# Altium PCB IMX_PCB.PcbDoc (part 1 of 2)
Units mm, origin at the board's own origin, x right, y up, seen from the top; angles counter-clockwise.
Board outline 66 x 57 mm, 4 copper layers (L1 (Sensor), L2 (GND), L3 (PWR), L4 (Comp)), stack 1.586 mm thick; 125 components, 55 nets, 466 pads, 337 vias.
Unrouted connection lines stored in the file: 246.
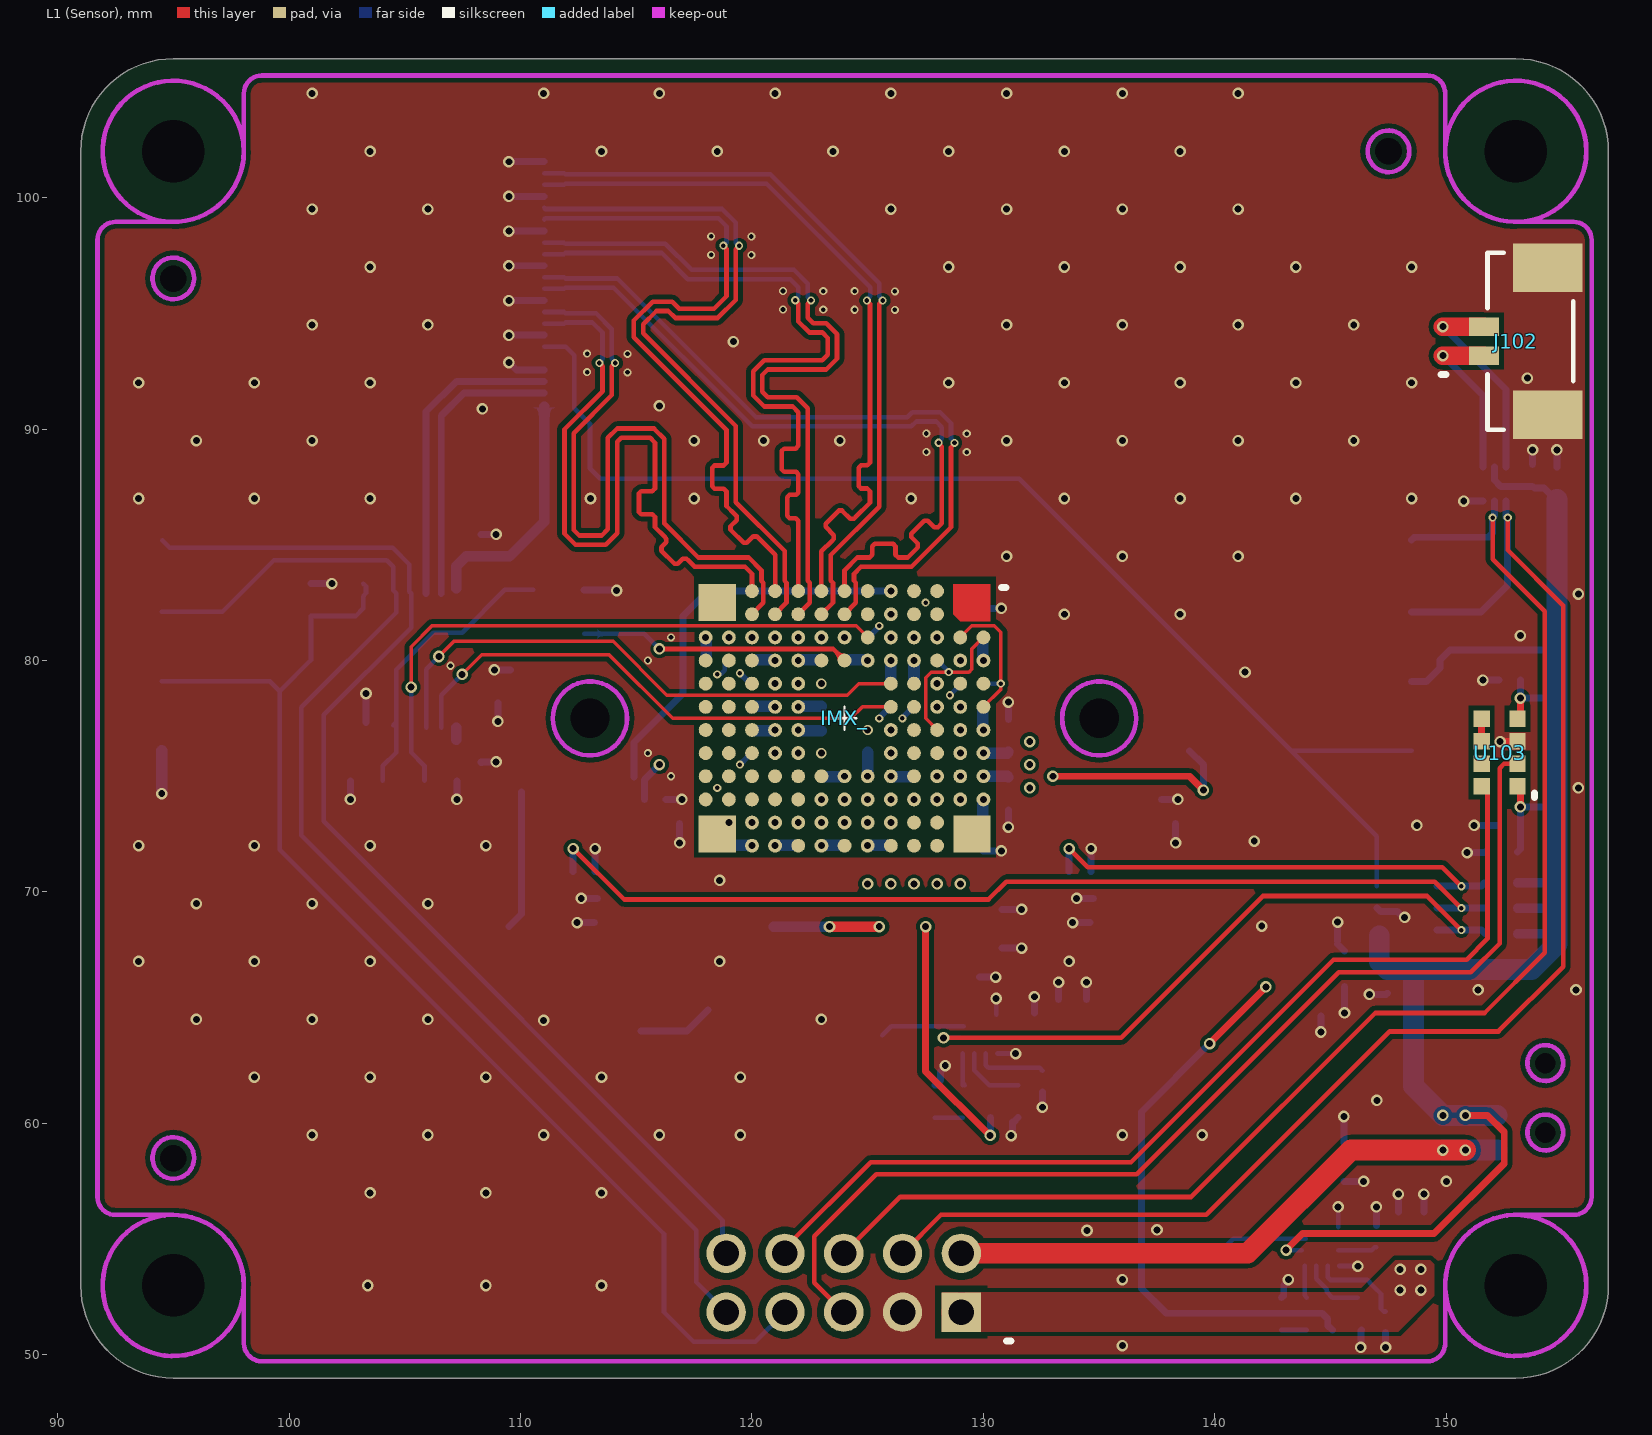
[diagram p0: L1 (Sensor) view]
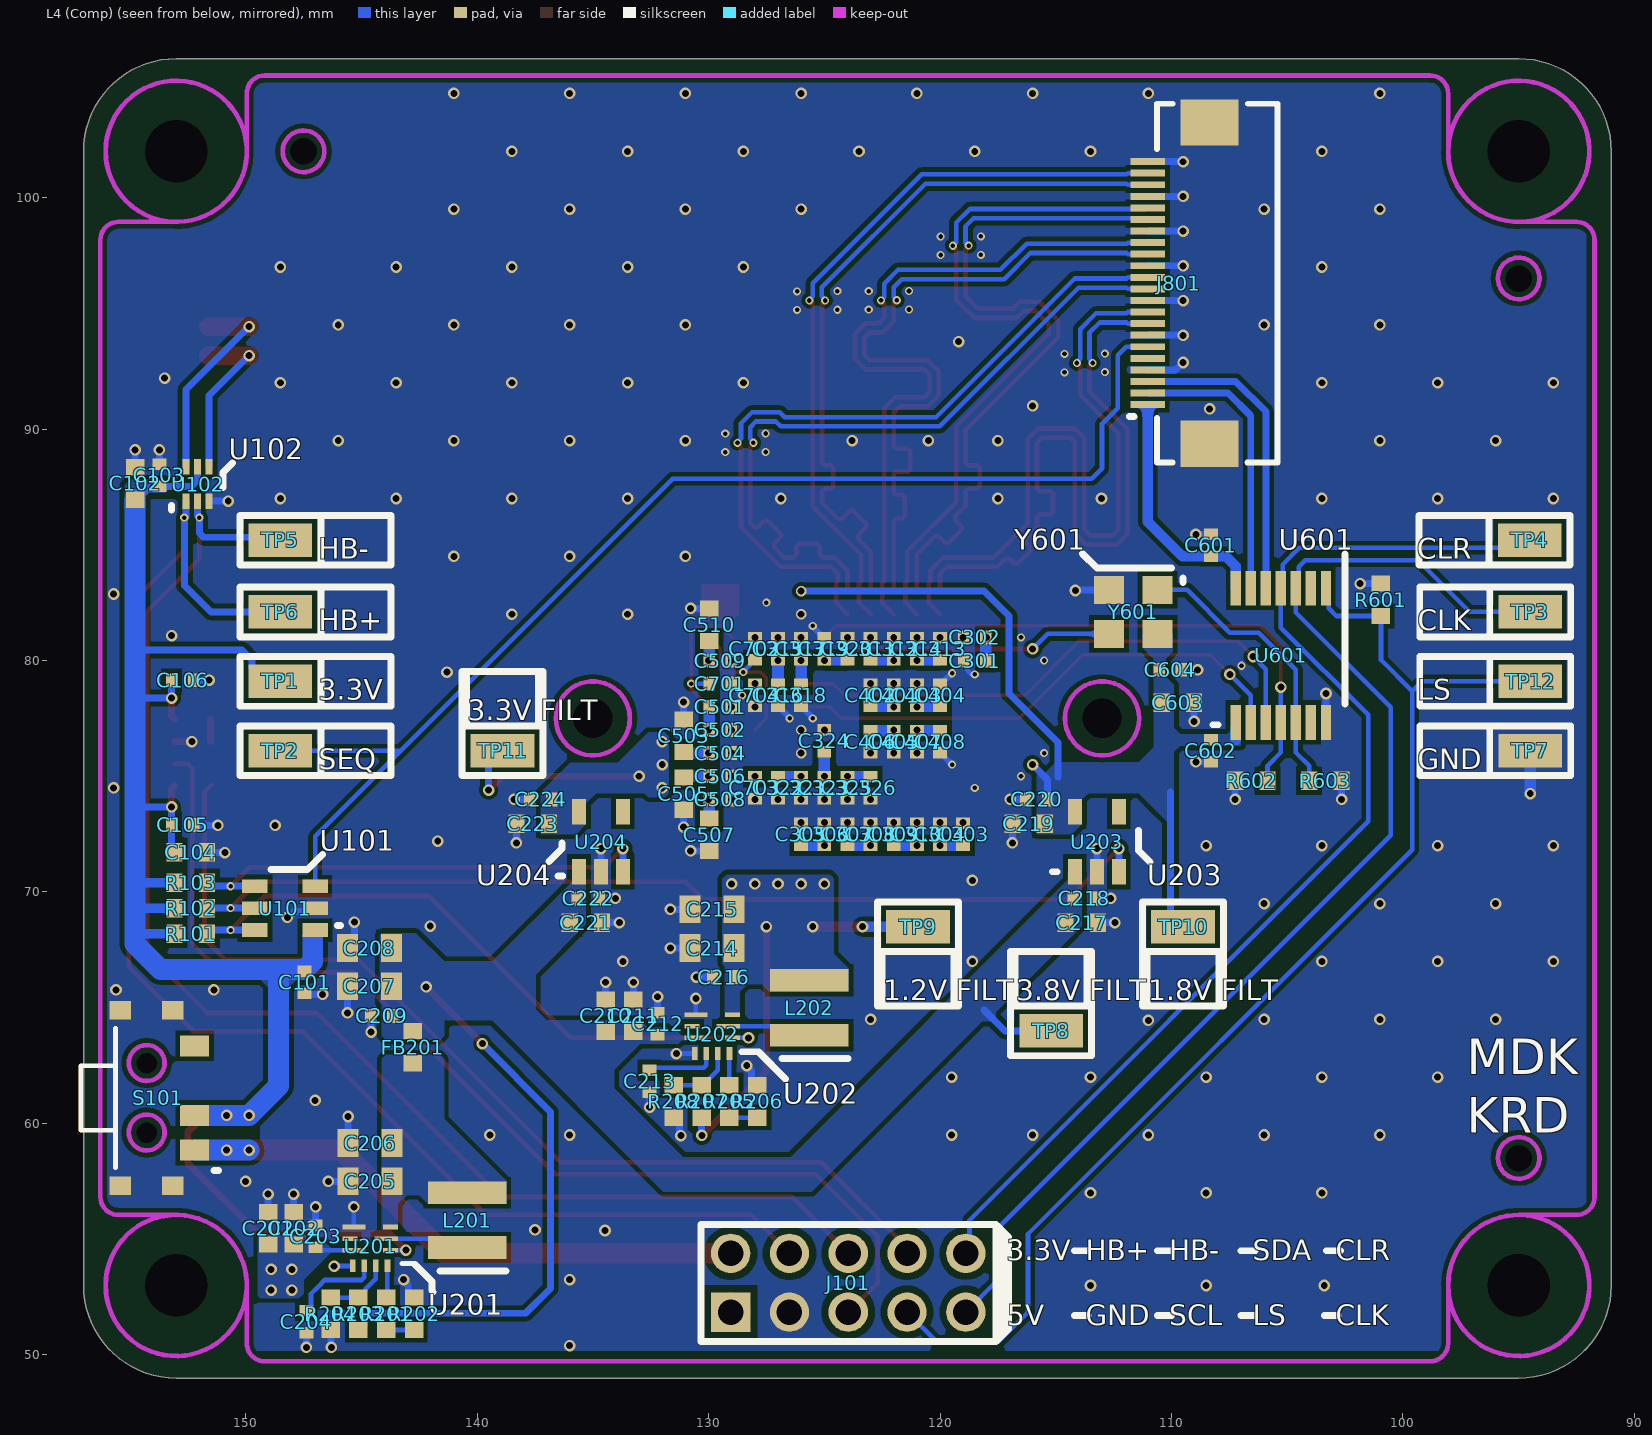
[diagram p1: L4 (Comp) view, seen from below]
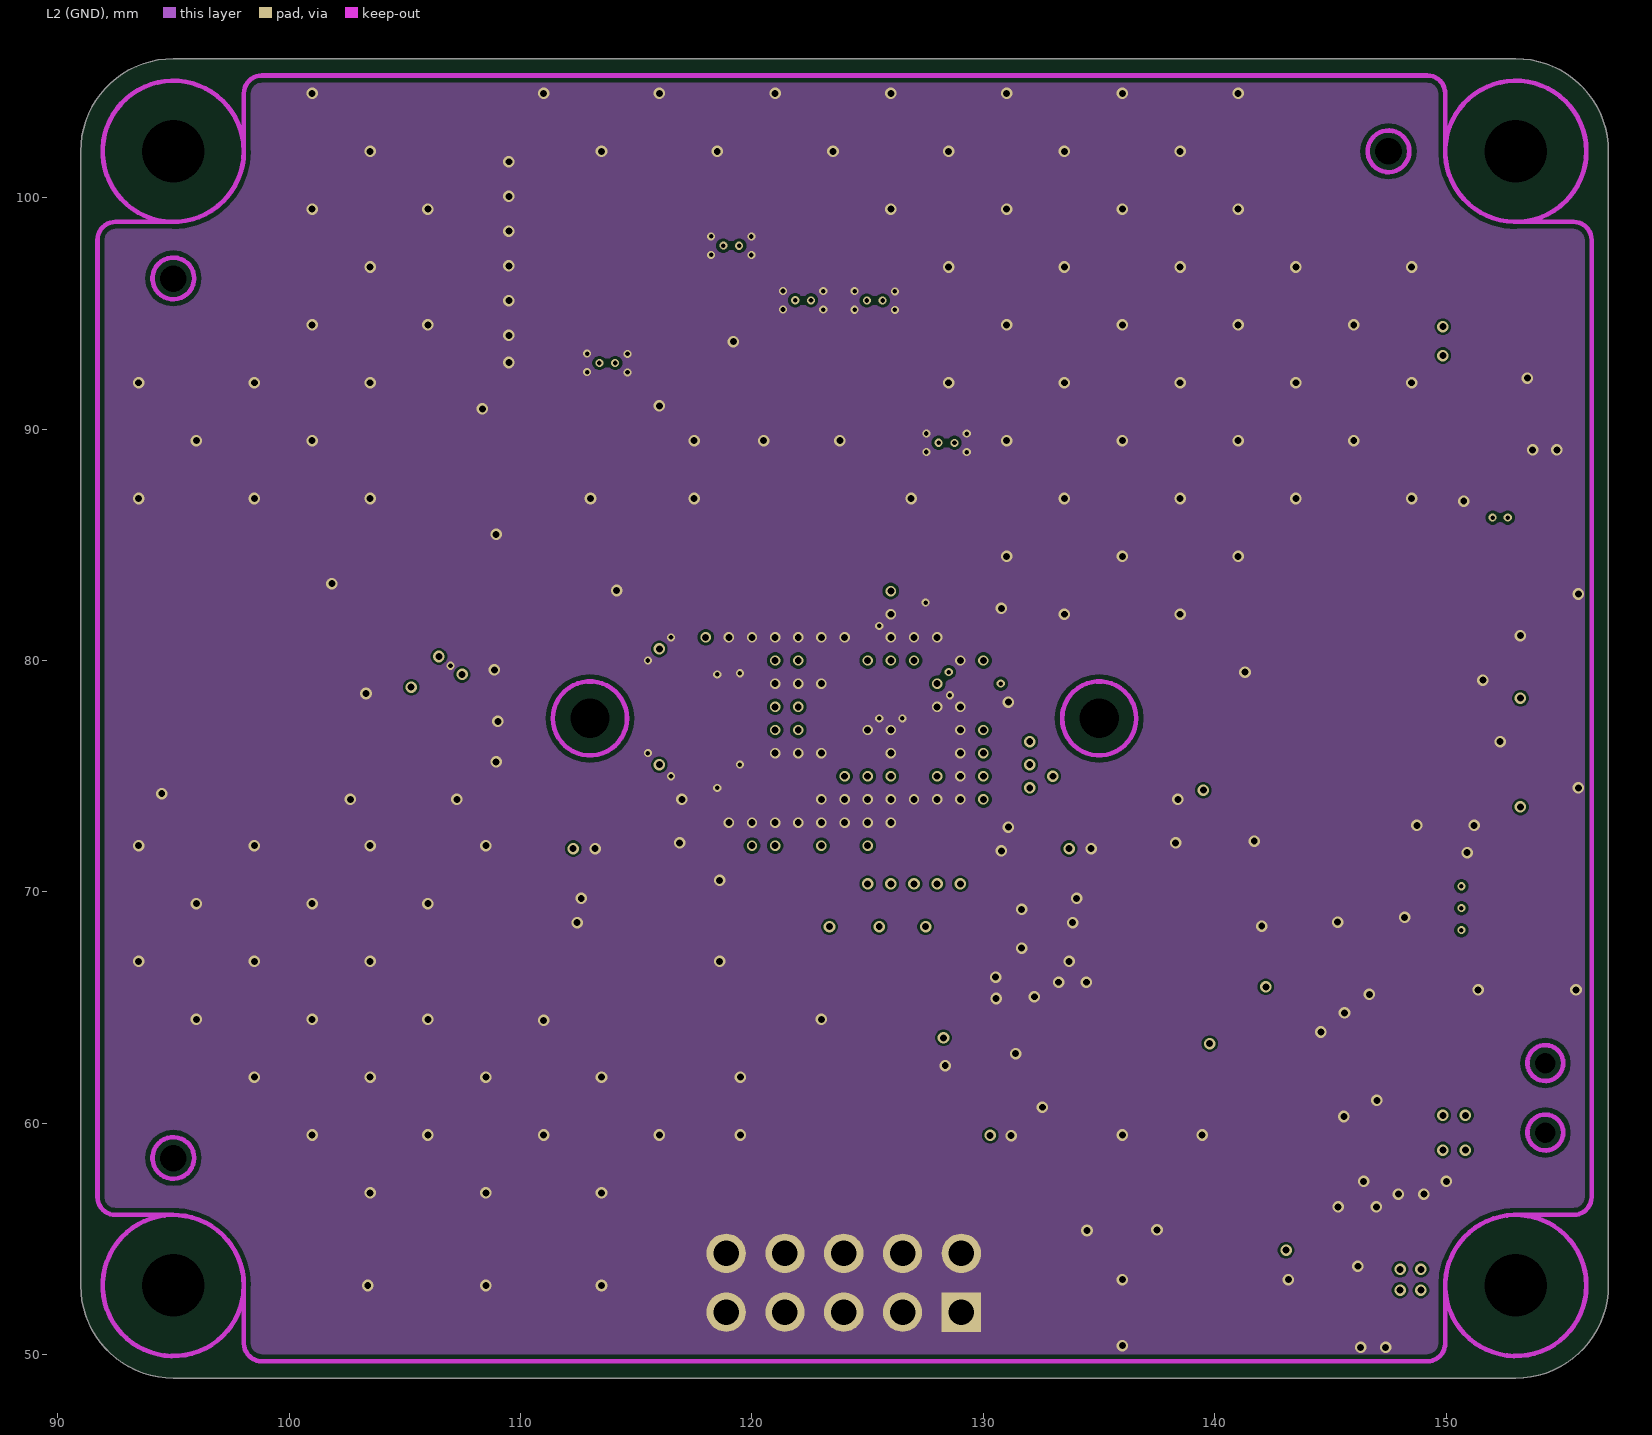
[diagram p2: L2 (GND)]
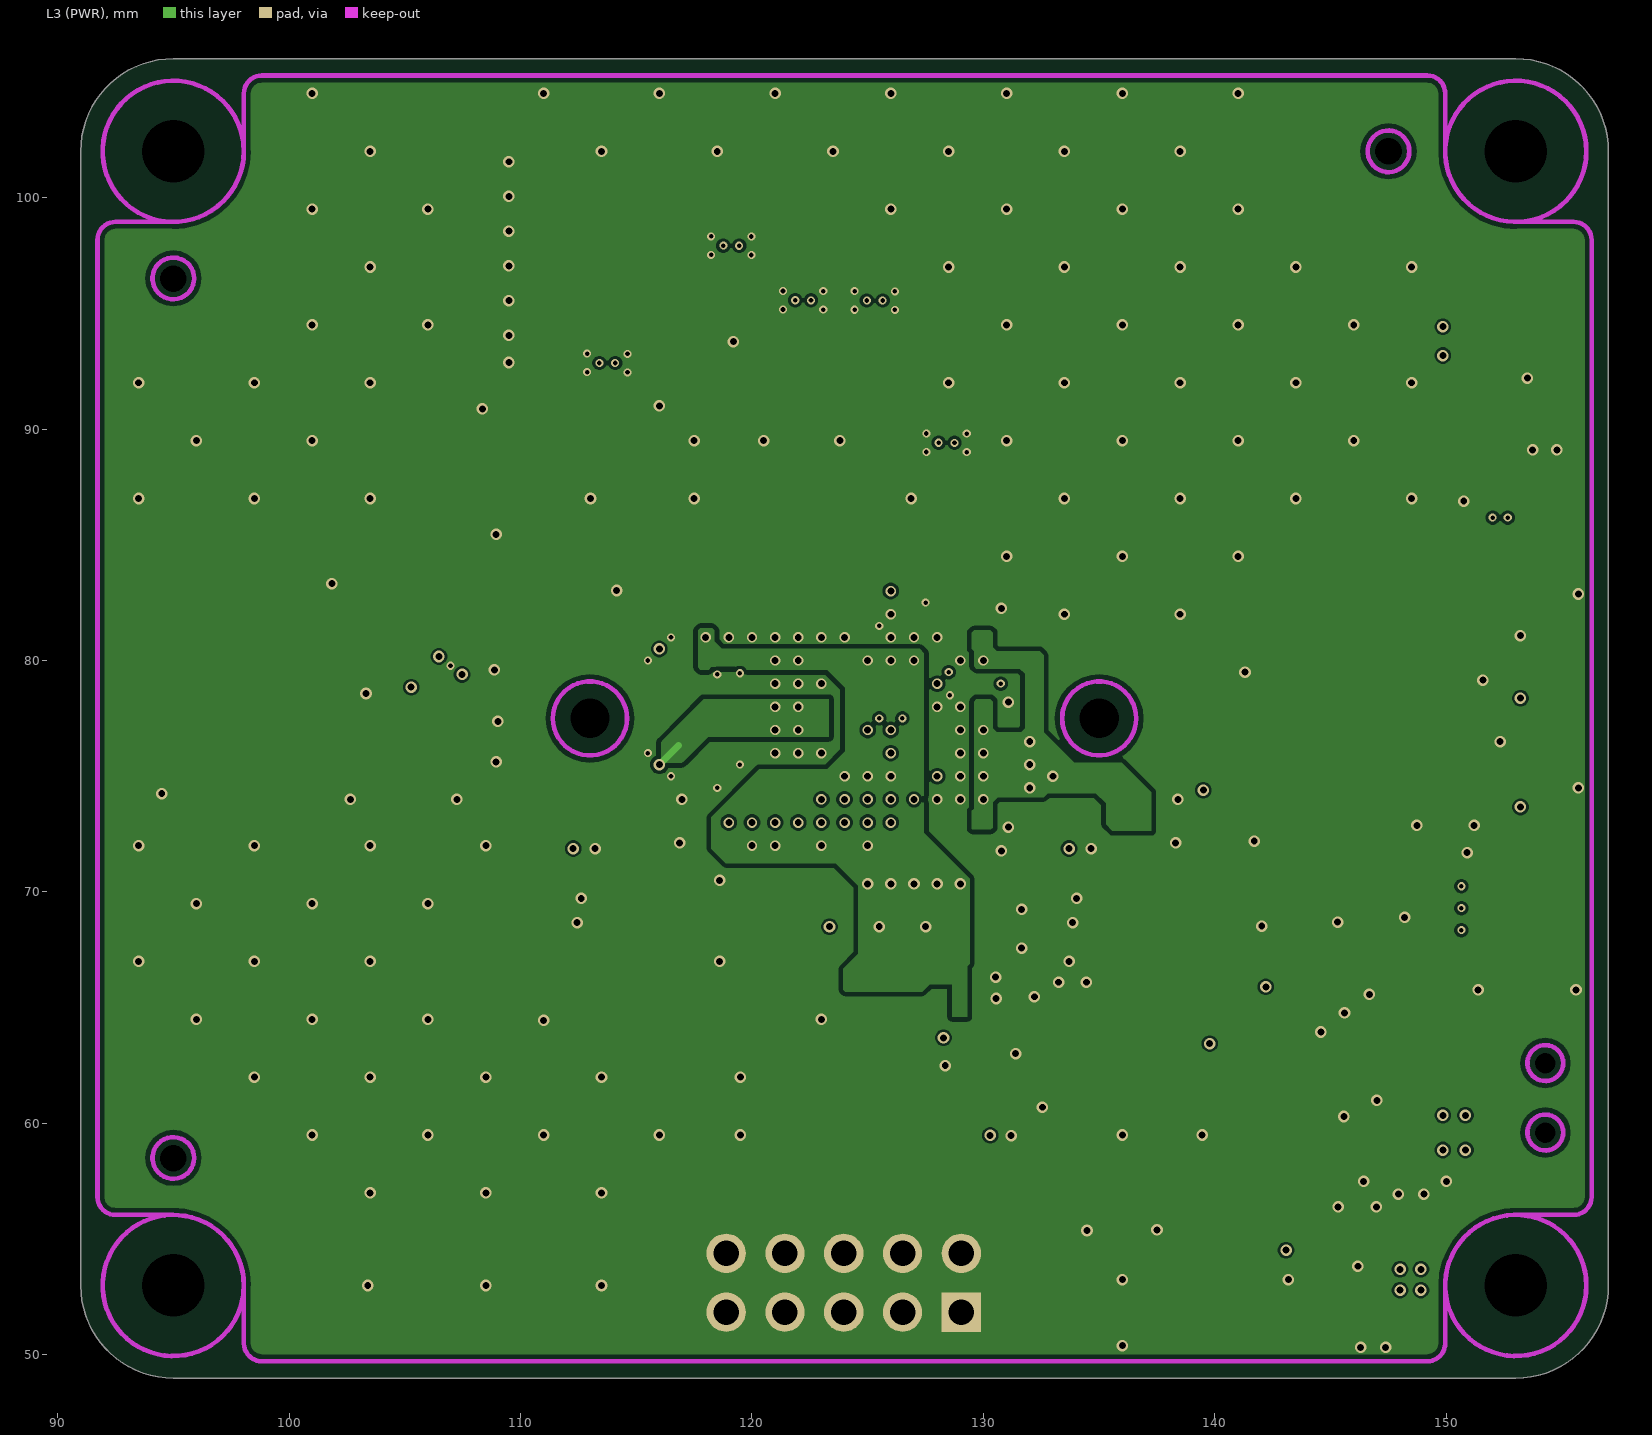
[diagram p3: L3 (PWR)]

## Layer stack, top to bottom
Top Solder: solder mask 0.0254, SM-001, Dk 3.8
L1 (Sensor): signal copper 0.035
Dielectric 1: prepreg 0.2104, PP-017, Dk 4.4
L2 (GND): signal copper 0.0152
Dielectric 3: core 1.065, Core-039, Dk 4.6
L3 (PWR): signal copper 0.0152
Dielectric 5: prepreg 0.2104, PP-017, Dk 4.4
L4 (Comp): signal copper 0.035
Bottom Solder: solder mask 0.0254, SM-001, Dk 3.8

## Board outline
91,53 ccw(c95,53) 95,49 153,49 ccw(c153,53) 157,53 157,102 ccw(c153,102) 153,106 95,106 ccw(c95,102) 91,102

## Design rules (kind name [scope] priority, off if disabled: settings)
Clearance [All] p1: gap=0.2 ignorepadtopadclearanceinfootprint=TRUE except(0.09: Arc-Arc Arc-Track Arc-SMDPad Track-Track Track-SMDPad; 0.15: Arc-Via Track-Via SMDPad-SMDPad SMDPad-Via SMDPad-Text Via-Via Via-Fill Via-Poly Via-Region; 0.3: Arc-THPad Track-THPad THPad-Fill THPad-Poly THPad-Region)
ComponentClearance [All] p1: gap=0.15 collisioncheckmode=3 verticalgap=2540 showdistances=FALSE
DiffPairsRouting [All] p1: maxlimit=0.254 minlimit=0.2 mostfreqgap=0.254 toplayer_maxgap=0.2 toplayer_prefgap=0.2 toplayer_minwidth=0.2 toplayer_maxwidth=0.2 toplayer_prefwidth=0.2 bottomlayer_maxgap=0.2 bottomlayer_prefgap=0.2 bottomlayer_minwidth=0.2 bottomlayer_maxwidth=0.2 bottomlayer_prefwidth=0.2 impedanceprofiledriven=TRUE impedanceprofileid={E44E2F03-DD7B-4348-AE94-67D662BADABC} impedanceprofilevalue=100.000000 maxuncoupledlength=12.7
HoleSize [All] p1: absolutevalues=TRUE maxlimit=6 minlimit=0.15 maxpercent=80.000 minpercent=20.000
HoleToHoleClearance [All] p1: gap=0.2 allowstackedmicrovias=TRUE
MatchedLengths MatchedLengths_1 [InDifferentialPairClass('All Differential Pairs')] p1: tolerance=0.02 checknetsindiffpair=FALSE checkdiffpairvsdiffpair=TRUE checkxsignals=TRUE checkothers=TRUE
MatchedLengths [InDifferentialPairClass('All Differential Pairs')] p2: tolerance=0.01 checknetsindiffpair=TRUE checkdiffpairvsdiffpair=FALSE checkxsignals=FALSE checkothers=FALSE
MinimumAnnularRing [All] p1: minimumring=0.049
MinimumSolderMaskSliver [All] p1: minsoldermaskwidth=0.1
PolygonConnect [All] p1: connectstyle=Direct reliefconductorwidth=0.254 reliefentries=4 polygonreliefangle="90 Angle" airgapwidth=0.254
RoutingCorners [All] p1: cornerstyle=45-Degree minsetback=2 maxsetback=2
RoutingVias [All] p1: holewidth=0.2 width=0.35 viastyle="Through Hole" minholewidth=0.15 minwidth=0.25 maxholewidth=1 maxwidth=1
SilkToSilkClearance [All] p1: silktosilkclearance=0
SilkToSolderMaskClearance [IsPad] p1: minsilkscreentomaskgap=0.1 clearancetoexposedcopper=TRUE
SolderMaskExpansion [All] p1: expansion=0.102 istentingtop=FALSE
SupplyNets "Schematic Supply Nets_8" [InNet('1.2V_FILT')] p1: voltage=0.000
SupplyNets "Schematic Supply Nets_7" [InNet('3.3V_FILT')] p2: voltage=0.000
SupplyNets "Schematic Supply Nets_6" [InNet('1.8V_FILT')] p3: voltage=0.000
SupplyNets "Schematic Supply Nets_3" [InNet('CSI2_3.3V')] p4: voltage=0.000
SupplyNets "Schematic Supply Nets_4" [InNet('GND')] p5: voltage=0.000
UnRoutedNet [All] p1: checkbadconnections=TRUE
ViasUnderSMD [All] p1: allowed=TRUE
Width [All] p1: maxlimit=3 minlimit=0.1 preferedwidth=0.2 minimp=50.000000 maximp=50.000000 favimp=50.000000
21 further rules are at their usual default settings.

## Classes and differential pairs
differential pair class DCK: CSI2_CK
differential pair class D3: CSI2_D3
differential pair class D2: CSI2_D2
differential pair class D1: CSI2_D1
differential pair class D0: CSI2_D0
differential pair CSI2_D3: +CSI2_D3_P -CSI2_D3_N
differential pair CSI2_D2: +CSI2_D2_P -CSI2_D2_N
differential pair CSI2_D1: +CSI2_D1_P -CSI2_D1_N
differential pair CSI2_D0: +CSI2_D0_P -CSI2_D0_N
differential pair CSI2_CK: +CSI2_CK_P -CSI2_CK_N

## Components (designator, comment, footprint, x,y, rotation, side; value= is the part's Value field where it differs from the comment)
C101 "100nF" "Capacitor, 0402" 147.45,66.1 r270 bottom
C102 "10uF" "Capacitor, 0603" 154.75,87.65 r90 bottom
C103 "100nF" "Capacitor, 0402" 153.725,88 r90 bottom
C104 "10uF" "Capacitor, 0603" 152.375,71.7 r180 bottom
C105 "100nF" "Capacitor, 0402" 152.725,72.9 r180 bottom
C106 "100nF" "Capacitor, 0402" 152.725,79.15 r180 bottom
C201 "10uF" "Capacitor, 0603" 149,55.475 r90 bottom
C202 "10uF" "Capacitor, 0603" 147.9,55.475 r90 bottom
C203 "100nF" "Capacitor, 0402" 146.975,55.125 r90 bottom
C204 "470nF" "Capacitor, 0402" 147.375,51.425 r270 bottom
C205 "22uF" "Capacitor, 0805" 144.625,57.5 r0 bottom
C206 "22uF" "Capacitor, 0805" 144.625,59.15 r0 bottom
C207 "22uF" "Capacitor, 0805" 144.65,65.925 r0 bottom
C208 "22uF" "Capacitor, 0805" 144.65,67.575 r0 bottom
C209 "470nF" "Capacitor, 0402" 144.125,64.65 r0 bottom
C210 "10uF" "Capacitor, 0603" 134.425,64.65 r90 bottom
C211 "10uF" "Capacitor, 0603" 133.225,64.65 r90 bottom
C212 "100nF" "Capacitor, 0402" 132.2,64.3 r90 bottom
C213 "470nF" "Capacitor, 0402" 132.55,61.825 r270 bottom
C214 "22uF" "Capacitor, 0805" 129.85,67.575 r0 bottom
C215 "22uF" "Capacitor, 0805" 129.85,69.25 r0 bottom
C216 "470nF" "Capacitor, 0402" 129.35,66.325 r0 bottom
C217 "4.7uF" "Capacitor, 0603" 113.875,68.65 r180 bottom
C218 "100nF" "Capacitor, 0402" 113.775,69.725 r180 bottom
C219 "4.7uF" "Capacitor, 0603" 116.175,72.975 r0 bottom
C220 "100nF" "Capacitor, 0402" 115.825,74 r0 bottom
C221 "4.7uF" "Capacitor, 0603" 135.3,68.65 r180 bottom
C222 "100nF" "Capacitor, 0402" 135.2,69.725 r180 bottom
C223 "4.7uF" "Capacitor, 0603" 137.6,72.975 r0 bottom
C224 "100nF" "Capacitor, 0402" 137.25,74 r0 bottom
C301 "1uF" "Capacitor, 0402" 118.5,80 r0 bottom
C302 "100nF" "Capacitor, 0402" 118.5,81 r0 bottom
C303 "1uF" "Capacitor, 0402" 119,72.5 r270 bottom
C304 "100nF" "Capacitor, 0402" 120,72.5 r270 bottom
C305 "4.7uF" "Capacitor, 0402" 126,72.5 r90 bottom
C306 "100nF" "Capacitor, 0402" 125,72.5 r90 bottom
C307 "4.7uF" "Capacitor, 0402" 124,72.5 r270 bottom
C308 "100nF" "Capacitor, 0402" 123,72.5 r270 bottom
C309 "4.7uF" "Capacitor, 0402" 122,72.5 r90 bottom
C310 "100nF" "Capacitor, 0402" 121,72.5 r90 bottom
C311 "1uF" "Capacitor, 0402" 123,80.5 r90 bottom
C312 "100nF" "Capacitor, 0402" 122,80.5 r90 bottom
C313 "1uF" "Capacitor, 0402" 120,80.5 r270 bottom
C314 "100nF" "Capacitor, 0402" 121,80.5 r270 bottom
C315 "100nF" "Capacitor, 0402" 127,80.5 r90 bottom
C316 "4.7uF" "Capacitor, 0402" 127,78.5 r270 bottom
C317 "100nF" "Capacitor, 0402" 126,80.5 r270 bottom
C318 "4.7uF" "Capacitor, 0402" 126,78.5 r90 bottom
C319 "100nF" "Capacitor, 0402" 125,80.5 r90 bottom
C320 "4.7uF" "Capacitor, 0402" 124,80.5 r90 bottom
C321 "100nF" "Capacitor, 0402" 126,74.5 r90 bottom
C322 "4.7uF" "Capacitor, 0402" 127,74.5 r90 bottom
C323 "100nF" "Capacitor, 0402" 125,74.5 r270 bottom
C324 "4.7uF" "Capacitor, 0402" 125,76.525 r90 bottom
C325 "100nF" "Capacitor, 0402" 124,74.5 r90 bottom
C326 "4.7uF" "Capacitor, 0402" 123,74.5 r90 bottom
C401 "10nF" "Capacitor, 0402" 122,78.5 r270 bottom
C402 "4.7uF" "Capacitor, 0402" 123,78.5 r270 bottom
C403 "10nF" "Capacitor, 0402" 121,78.5 r90 bottom
C404 "4.7uF" "Capacitor, 0402" 120,78.5 r90 bottom
C405 "10nF" "Capacitor, 0402" 122,76.5 r90 bottom
C406 "4.7uF" "Capacitor, 0402" 123,76.5 r90 bottom
C407 "10nF" "Capacitor, 0402" 121,76.5 r270 bottom
C408 "4.7uF" "Capacitor, 0402" 120,76.5 r270 bottom
C501 "1uF" "Capacitor, 0402" 129.5,78 r180 bottom
C502 "100nF" "Capacitor, 0402" 129.5,77 r180 bottom
C503 "10uF" "Capacitor, 0603" 131.05,76.75 r90 bottom
C504 "100nF" "Capacitor, 0402" 129.5,76 r180 bottom
C505 "10uF" "Capacitor, 0603" 131.05,74.25 r90 bottom
C506 "100nF" "Capacitor, 0402" 129.5,75 r0 bottom
C507 "10uF" "Capacitor, 0603" 130,72.475 r270 bottom
C508 "100nF" "Capacitor, 0402" 129.5,74 r180 bottom
C509 "100nF" "Capacitor, 0402" 129.5,80 r180 bottom
C510 "10uF" "Capacitor, 0603" 129.95,81.55 r90 bottom
C601 "100nF" "Capacitor, 0402" 108.3,84.975 r270 bottom
C602 "100nF" "Capacitor, 0402" 108.3,76.1 r270 bottom
C603 "4.7uF" "Capacitor, 0603" 109.725,78.15 r180 bottom
C604 "100nF" "Capacitor, 0402" 110.05,79.6 r180 bottom
C701 "1uF" "Capacitor, 0402" 129.5,79 r0 bottom
C702 "1uF" "Capacitor, 0402" 128,80.5 r270 bottom
C703 "220nF" "Capacitor, 0402" 128,74.5 r90 bottom
C704 "1uF" "Capacitor, 0402" 128,78.5 r270 bottom
FB201 "BLE18PS080SN1D" "Ferrite Bead, 0603" 142.75,63.3 r90 bottom
IMX_ "IMX385 Digital Power 1.2V" IMX385LQR 124,77.5 r0 top locked
J101 "ZX-PZ2.54-2-5PZZ" "Pin Header, DIP 2x5, 2.54mm" 124,53.151 r180 bottom
J102 "533980271" "Molex PicoBlade, Wire To Board 1x2, 533980271" 153,93.8 r90 top
J801 "FPC-05F-22PH20" "FFC Connector" 107.725,95.975 r90 bottom
L201 "2.2uH" "Inductor, 1616" 140.425,55.825 r90 bottom
L202 "2.2uH" "Inductor, 1616" 125.65,65 r90 bottom
R101 "100kΩ" "Resistor, 0603, Yageo" 152.375,68.2 r0 bottom
R102 "100kΩ" "Resistor, 0603, Yageo" 152.375,69.3 r0 bottom
R103 "100kΩ" "Resistor, 0603, Yageo" 152.375,70.4 r0 bottom
R201 "36kΩ" "Resistor, 0603, Yageo" 143.925,51.775 r90 bottom
R202 "6.2kΩ" "Resistor, 0603, Yageo" 142.725,51.775 r270 bottom
R203 "7.5kΩ" "Resistor, 0603, Yageo" 145.125,51.775 r270 bottom
R204 "2kΩ" "Resistor, 0603, Yageo" 146.325,51.775 r90 bottom
R205 "36kΩ" "Resistor, 0603, Yageo" 129.1,60.95 r90 bottom
R206 "6.2kΩ" "Resistor, 0603, Yageo" 127.9,60.95 r270 bottom
R207 "1kΩ" "Resistor, 0603, Yageo" 130.3,60.95 r270 bottom
R208 "2kΩ" "Resistor, 0603, Yageo" 131.5,60.95 r90 bottom
R601 "10kΩ" "Resistor, 0603, Yageo" 100.95,82.625 r270 bottom
R602 "100kΩ" "Resistor, 0603, Yageo" 106.55,74.8 r180 bottom
R603 "100kΩ" "Resistor, 0603, Yageo" 103.35,74.8 r0 bottom
S101 "MK-12C02-G020" "Swich, 1A, Single Pole Double Throw, MK-12C02-G020" 154.275,61.1 r90 bottom
TP1 "RH-5015" "Test Point" 148.5,79.1 r180 bottom
TP2 "RH-5015" "Test Point" 148.5,76.1 r180 bottom
TP3 "RH-5015" "Test Point" 94.5,82.1 r180 bottom
TP4 "RH-5015" "Test Point" 94.525,85.2 r180 bottom
TP5 "RH-5015" "Test Point" 148.5,85.2 r180 bottom
TP6 "RH-5015" "Test Point" 148.5,82.1 r180 bottom
TP7 "RH-5015" "Test Point" 94.5,76.1 r180 bottom
TP8 "RH-5015" "Test Point" 115.2,64 r0 bottom
TP9 "RH-5015" "Test Point" 120.95,68.5 r180 bottom
TP10 "RH-5015" "Test Point" 109.5,68.5 r180 bottom
TP11 "RH-5015" "Test Point" 138.9,76.1 r180 bottom
TP12 "RH-5015" "Test Point" 94.5,79.1 r180 bottom
U101 "LM3880MF-1AB" "Sequencer, SOT-23" 148.3,69.3 r0 bottom
U102 "DRV8210DRLR" "H-Bridge, SOT-563" 152.075,87.625 r90 bottom
U103 "RPR-0521RS" "Rohm ALS" 152.3,76.025 r90 top
U201 "TPS62912RPUR" "Buck Converter, TPS62912RPUR" 144.625,54.775 r0 bottom
U202 "TPS62912RPUR" "Buck Converter, TPS62912RPUR" 129.85,63.95 r0 bottom
U203 "TPS7A2018PDBVR" "TPS7A20 - SOT-23-5L" 113.225,72.175 r90 bottom
U204 "TPS7A2033PDBVR" "TPS7A20 - SOT-23-5L" 134.65,72.175 r90 bottom
U601 "TXS0104EPWR" "Level Shifter, 4-Bit" 105.275,80.225 r90 bottom
Y601 "OT322537.125MJBA4SL" "Clock Oscillator, 3235, 37.125" 111.65,82.1 r0 bottom

## Footprints (in the part's own frame and the unit in brackets; to place one, negate y for a bottom-side part, rotate by r counter-clockwise, add the part's x,y. Pads: shape width x height; smd on the part's side, far side on the other; paste and mask are expansions set on the pad)
"Buck Converter, TPS62912RPUR" [mm]
  rect 0.65x0.2 smd mask+0: 1(-0.875,0.25) 3(-0.875,-0.75) 5(0.875,-0.25)
  rect 1x0.2 smd mask+0: 2(-0.7,-0.25) 4(0.7,-0.75) 6(0.7,0.25)
  rect 0.25x0.55 smd mask+0: 7(0.75,0.925) 8(0.25,0.925) 9(-0.25,0.925) 10(-0.75,0.925)
  body extent -1.01,-1 1.01,1.01, height 0.95
"Capacitor, 0402" [mm]
  rect 0.5x0.6 smd mask+0: 1(-0.475,0) 2(0.475,0)
  body extent -0.5,-0.25 0.5,0.25, height 0.8
"Capacitor, 0603" [mm]
  rect 0.7x0.8 smd mask+0: 1(-0.7,0.025) 2(0.7,0.025)
  body extent -0.8,-0.37 0.8,0.43, height 1
"Capacitor, 0805" [mm]
  rect 0.9x1.2 smd mask+0: 1(-0.95,0) 2(0.95,0)
  body extent -1,-0.63 1,0.63, height 1.6
"Clock Oscillator, 3235, 37.125" [mm]
  rect 1.3x1.2 smd mask+0: 1(-1.05,-0.95) 2(1.05,-0.95) 3(1.05,0.95) 4(-1.05,0.95)
  body extent -1.6,-1.25 1.6,1.25, height 0.8
"Ferrite Bead, 0603" [mm]
  rect 0.7x0.8 smd mask+0: 1(-0.7,0.025) 2(0.7,0.025)
  body extent -0.8,-0.39 0.8,0.44, height 0.82
"FFC Connector" [mm] "#FPC-05F-22PH20, JLC#"
  rect 0.3x1.5 smd paste+0 mask+0: 1(5.58,3.302) 2(5.081,3.302) 3(4.58,3.302) 4(4.081,3.302) 5(3.58,3.302) 6(3.081,3.302) 7(2.58,3.302) 8(2.081,3.302) 9(1.58,3.302) 10(1.081,3.302) 11(0.58,3.302) 12(0.081,3.302) 13(-0.42,3.302) 14(-0.919,3.302) 15(-1.42,3.302) 16(-1.919,3.302) 17(-2.42,3.302) 18(-2.919,3.302) 19(-3.42,3.302) 20(-3.919,3.302) 21(-4.42,3.302) 22(-4.919,3.302)
  rect 2x2.5 smd paste+0 mask+0: 23(7.27,0.627) 24(-6.61,0.627)
  silkscreen extent -7.42,-2.3 8.08,2.9, body extent -8.47,-3.37 9.13,3.23, height 2.24
"H-Bridge, SOT-563" [mm]
  rect 0.67x0.3 smd mask+0: 1(-0.74,0.5) 2(-0.74,0) 3(-0.74,-0.5) 4(0.74,-0.5) 5(0.74,0) 6(0.74,0.5)
  body extent -0.8,-0.8 0.8,0.8, height 0.6
IMX385LQR [mm]
  round 0.025 smd mask+0: A1(5.5,5)
  round 0.6 smd mask+0: A3(6,3.5) A4(6,2.5) A5(6,1.5) A6(6,0.5) A7(6,-0.5) A8(6,-1.5) A9(6,-2.5) A10(6,-3.5) B3(5,3.5) B4(5,2.5) B5(5,1.5) B6(5,0.5) B7(5,-0.5) B8(5,-1.5) B9(5,-2.5) B10(5,-3.5) C1(4,5.5) C2(4,4.5) C3(4,3.5) C4(4,2.5) C5(4,1.5) C6(4,0.5) C7(4,-0.5) C8(4,-1.5) C9(4,-2.5) C10(4,-3.5) C11(4,-4.5) C12(4,-5.5) D1(3,5.5) D2(3,4.5) D3(3,3.5) D4(3,2.5) D5(3,1.5) D6(3,0.5) D7(3,-0.5) D8(3,-1.5) D9(3,-2.5) D10(3,-3.5) D11(3,-4.5) D12(3,-5.5) E1(2,5.5) E2(2,4.5) E3(2,3.5) E4(2,2.5) E5(2,1.5) E6(2,0.5) E7(2,-0.5) E8(2,-1.5) E9(2,-2.5) E10(2,-3.5) E11(2,-4.5) E12(2,-5.5) F1(1,5.5) F2(1,4.5) F3(1,3.5) F4(1,2.5) F9(1,-2.5) F10(1,-3.5) F11(1,-4.5) F12(1,-5.5) G1(0,5.5) G2(0,4.5) G3(0,3.5) G4(0,2.5) G9(0,-2.5) G10(0,-3.5) G11(0,-4.5) G12(0,-5.5) H1(-1,5.5) H2(-1,4.5) H3(-1,3.5) H4(-1,2.5) H9(-1,-2.5) H10(-1,-3.5) H11(-1,-4.5) H12(-1,-5.5) J1(-2,5.5) J2(-2,4.5) J3(-2,3.5) J4(-2,2.5) J5(-2,1.5) J6(-2,0.5) J7(-2,-0.5) J8(-2,-1.5) J9(-2,-2.5) J10(-2,-3.5) J11(-2,-4.5) J12(-2,-5.5) K1(-3,5.5) K2(-3,4.5) K3(-3,3.5) K4(-3,2.5) K5(-3,1.5) K6(-3,0.5) K7(-3,-0.5) K8(-3,-1.5) K9(-3,-2.5) K10(-3,-3.5) K11(-3,-4.5) K12(-3,-5.5) L1(-4,5.5) L2(-4,4.5) L3(-4,3.5) L4(-4,2.5) L5(-4,1.5) L6(-4,0.5) L7(-4,-0.5) L8(-4,-1.5) L9(-4,-2.5) L10(-4,-3.5) L11(-4,-4.5) L12(-4,-5.5) M3(-5,3.5) M4(-5,2.5) M5(-5,1.5) M6(-5,0.5) M7(-5,-0.5) M8(-5,-1.5) M9(-5,-2.5) M10(-5,-3.5) N3(-6,3.5) N4(-6,2.5) N5(-6,1.5) N6(-6,0.5) N7(-6,-0.5) N8(-6,-1.5) N9(-6,-2.5) N10(-6,-3.5)
  rect 1.6x1.6 smd mask+0: A12(5.5,-5) N1(-5.5,5) N12(-5.5,-5)
  L1 (Sensor) region: 4.7,5.8 6.3,5.8 6.3,4.2 5,4.2 4.7,4.5
  silkscreen extent -0.5,-0.5 0.5,0.5
"Inductor, 1616" [mm]
  rect 0.98x3.4 smd paste+0 mask+0: 1(-1.185,0) 2(1.185,0)
  body extent -2,-2 2,2, height 3.1
"Level Shifter, 4-Bit" [mm]
  rect 1.5x0.45 smd mask+0: 1(-2.9,1.95) 2(-2.9,1.3) 3(-2.9,0.65) 4(-2.9,0) 5(-2.9,-0.65) 6(-2.9,-1.3) 7(-2.9,-1.95) 8(2.9,-1.95) 9(2.9,-1.3) 10(2.9,-0.65) 11(2.9,0) 12(2.9,0.65) 13(2.9,1.3) 14(2.9,1.95)
  body extent -3.2,-2.5 3.2,2.5, height 1.13
"Molex PicoBlade, Wire To Board 1x2, 533980271" [mm] "1x2P 2P PicoBlade(MX 1.25) Tin 2 -40℃~+105℃ 1A 1 1.25mm Phosphor Bronze Standing paste SMD,P=1.25mm Wire To Board Connector ROHS"
  rect 0.8x1.3 smd mask+0: 1(-0.625,1.375) 2(0.625,1.375)
  rect 2.1x3 smd mask+0: 3(-3.175,-1.375) 4(3.175,-1.375)
  silkscreen extent -3.82,-2.47 3.83,1.22, body extent -3.82,-2.49 3.83,1.71, height 4.72
"Pin Header, DIP 2x5, 2.54mm" [mm]
  rect 1.7x1.7 hole 1.1 mask+0: 1(-5.045,-1.301)
  round 1.7 hole 1.1 mask+0: 2(-5.045,1.239) 3(-2.505,-1.301) 4(-2.505,1.239) 5(0.035,-1.301) 6(0.035,1.239) 7(2.575,-1.301) 8(2.575,1.239) 9(5.115,-1.301) 10(5.115,1.239)
  body extent -6.32,-2.57 6.38,2.51, height 8.57
"Resistor, 0603, Yageo" [mm]
  rect 0.7x0.8 smd mask+0: 1(-0.7,0) 2(0.7,0)
  body extent -0.8,-0.4 0.8,0.4, height 0.55
"Rohm ALS" [mm]
  rect 0.72x0.7 smd mask+0: 1(-1.455,-0.775) 2(-0.485,-0.775) 3(0.485,-0.775) 4(1.455,-0.775) 5(1.455,0.775) 6(0.485,0.775) 7(-0.485,0.775) 8(-1.455,0.775)
  body extent -1.97,-1.18 1.97,1.18, height 1.35
"Sequencer, SOT-23" [mm]
  rect 1.1x0.6 smd mask+0: 1(-1.3,0.95) 2(-1.3,0) 3(-1.3,-0.95) 4(1.3,-0.95) 5(1.3,0) 6(1.3,0.95)
  body extent -1.4,-1.45 1.4,1.45, height 1.2
"Swich, 1A, Single Pole Double Throw, MK-12C02-G020" [mm]
  rect 0.9x1.25 smd mask+0: 1(-2.25,-2.075) 2(-0.75,-2.075) 3(2.25,-2.075)
  round 0 hole 0.9 unplated mask+0: MH1(-1.5,0) MH2(1.5,0)
  rect 0.8x0.93 smd mask+0: MP1(-3.8,-1.135) MP2(-3.8,1.135) MP3(3.8,-1.135) MP4(3.8,1.135)
  silkscreen extent -3,1.35 3,2.85, body extent -3.85,-2.2 3.85,2.8, height 1.41
"Test Point" [mm]
  rect 2.75x1.45 smd mask+0: 1(0,0)
  silkscreen extent -1.75,-1.08 1.75,1.08, body extent -0.8,-0.4 0.8,0.4, height 1.28
"TPS7A20 - SOT-23-5L" [mm]
  rect 1.1x0.6 smd mask+0: 1(-1.3,0.95) 2(-1.3,0) 3(-1.3,-0.95) 4(1.3,-0.95) 5(1.3,0.95)
  body extent -1.4,-1.45 1.4,1.45, height 1.2

## Part data
C101 C103 C105 C106 C203 C212 C218 C220 C222 C224 C302 C304 C306 C308 C310 C312 C314 C315 C317 C319 C321 C323 C325 C502 C504 C506 C508 C509 C601 C602 C604: library part "Capacitor, 0402, 100nF", "Ceramic Capacitor, 16V, 10% +/- Tol, X7R, 0.1uF, SMD, 0402, #CL05B104KO5NNNC, JLC#C1525", Capacitance=100nF
C102 C104 C201 C202 C210 C211 C503 C505 C507 C510: library part "Capacitor, 0603, 10uF", "Ceramic Capacitor, 10V, 10% +/- Tol, X7R, 10uF, SMD, 0603, #GRM188Z71A106KA73D, JLC#C2959727", Capacitance=10uF
C204 C209 C213 C216: library part "Capacitor, 0402, 470nF", "16V 470nF X7R ±10% 0402 Multilayer Ceramic Capacitors MLCC - SMD/SMT ROHS, #GRM155R71C474KE01D, JLC#C471404", Capacitance=470nF
C205 C206 C207 C208 C214 C215: library part "Capacitor, 0805, 22uF, X5R", "16V 22uF X5R ±10% 0805 Multilayer Ceramic Capacitors MLCC - SMD/SMT ROHS, #CL21A226KOQNNNE, JLC#C296720", Capacitance=22uF
C217 C219 C221 C223 C603: library part "Capacitor, 0603, 4.7uF", "Ceramic Capacitor, 10V, 10% +/- Tol, X7R, 4.7uF, SMD, 0603, #GRM188Z71A475KE15D, JLC#C913474", Capacitance=4.7uF
C301 C303 C311 C313 C501 C701 C702 C704: library part "Capacitor, 0402, 1uF", "Ceramic Capacitor, 10V, 10% +/- Tol, X7R, 1uF, SMD, 0402, #GRM155Z71A105KE01D, JLC#C528974", Capacitance=1uF
C305 C307 C309 C316 C318 C320 C322 C324 C326 C402 C404 C406 C408: library part "Capacitor, 0402, 4.7uF", "Ceramic Capacitor, 10V, 10% +/- Tol, X5R, 4.7uF, SMD, 0402, #CL05A475KP5NRNC, JLC#C368809", Capacitance=4.7uF
C401 C403 C405 C407: library part "Capacitor, 0402, 10nF", "Ceramic Capacitor, 16V, 10% +/- Tol, X7R, 10nF, SMD, 0402, #CL05B103KO5NNNC, JLC#C318577", Capacitance=10nF
C703: library part "Capacitor, 0402, 220nF", "Ceramic Capacitor, 16V, 10% +/- Tol, X7R, 220nF, SMD, 0402, #CL05B224KO5NNNC, JLC#C16772", Capacitance=220nF
FB201: library part "Ferrite Bead, 0603, 4mΩ 8.5Ω@100MHz", "4mΩ 8.5Ω@100MHz 0603 Ferrite Beads ROHS, #BLE18PS080SN1D, JLC#C3764407"
IMX_: library part IMX385LQR
J101: library part "Pin Header, DIP 2x5, 2.54mm", "Gold 1kV 3A Direct Insert Policy 2.5mm 10P 6mm -40℃~+105℃ 3mm 2.54mm Brass Double Row Black 2.54mm 2x5P Plugin,P=2.54mm Pin Headers ROHS. #ZX-PZ2.54-2-5PZZ, #C7501276"
J102: library part "Molex PicoBlade, Wire To Board 1x2", "1x2P 2P PicoBlade(MX 1.25) Tin 2 -40℃~+105℃ 1A 1 1.25mm Phosphor Bronze Standing paste SMD,P=1.25mm Wire To Board Connector ROHS, #533980271, JLC#C122410"
J801: library part "CSI-2 Connector", "SMD,P=0.5mm,Surface Mount, Right Angle, #FPC-05F-22PH20, #C2856804"
L201 L202: library part "Inductor, 1616, 2.2uH", "2.2uH ±20% 7A 1616 Power Inductors ROHS, #XGL4030-222MEC, JLC#C6616463", Case/Package=SMD/SMT, DC Resistance (DCR)=8.36mR, Inductance Tolerance=20%, Max DC Current=11.2A, Max Operating Temperature=125°C, Min Operating Temperature=-40°C, Package Quantity=40, RMS Current (Irms)=7A, Saturation Current=3.5A, Self Resonant Frequency=89MHz, Test Frequency=100kHz, Core Material=Composite, Height=1.6mm, Inductance=2.2uH, Lead Free="Contains Lead", Length=4.3mm, Mount="Surface Mount", Packaging="Tape and Reel", REACH SVHC="No SVHC", RoHS Compliant=Yes, Series=XFL4015, Shielding=Shielded, Termination=SMD/SMT, Tolerance=20%, Width=4.3mm
R101 R102 R103 R602 R603: library part "Resistor, 0603, 100kΩ", "Thick Film Resistor, ±1%, ±100ppm/℃, -55℃~+155℃, 0603, 100kΩ, #RC0603FR-07100KL, JLC#C14675"
R201 R205: library part "Resistor, 0603, 36kΩ", "100mW Thick Film Resistors 75V ±100ppm/℃ ±1% 36kΩ 0603 Chip Resistor - Surface Mount ROHS, #RC0603FR-0736KL, JLC#C114619"
R202 R206: library part "Resistor, 0603, 6.2kΩ", "100mW Thick Film Resistors 75V ±100ppm/℃ ±1% 6.2kΩ 0603 Chip Resistor - Surface Mount ROHS, #RC0603FR-076K2L, JLC#C114631"
R203: library part "Resistor, 0603, 7.5kΩ", "100mW Thick Film Resistors 75V ±100ppm/℃ ±1% 7.5kΩ 0603 Chip Resistor - Surface Mount ROHS, #RC0603FR-077K5L, JLC#C114634"
R204 R208: library part "Resistor, 0603, 2kΩ", "100mW Thick Film Resistors 75V ±100ppm/℃ ±1% 2kΩ 0603 Chip Resistor - Surface Mount ROHS, #RC0603FR-072KL, JLC#C105576"
R207: library part "Resistor, 0603, 1kΩ", "Thick Film Resistor, ±1%, ±100ppm/℃, -55℃~+155℃, 0603 Chip Resistor - Surface Mount ROHS, #RC0603FR-071KL, JLC#C22548"
R601: library part "Resistor, 0603, 10kΩ", "Thick Film Resistor, ±1%, ±100ppm/℃, -55℃~+155℃, 0603, 10kΩ, #RC0603FR-0710KL, JLC#C98220"
S101: library part "Swich, 1A, Single Pole Double Throw", "Horizontal attachment 1A Single Pole Double Throw (SPDT) 6V Black 10,000 times SMD Slide Switches ROHS, JLC#C963206"
TP1 TP2 TP3 TP4 TP5 TP6 TP7 TP8 TP9 TP10 TP11 TP12: library part "Test Ring", "Pogo Pin Spring Probe Connector ROHS, #RH-5015, JLC#C5199798"
U101: library part "Sequencer, 3 Flags, 30ms, 1-2-3/3-2-1", "USON-6-EP(2.1x2.1) Ambient Light Sensors ROHS, JLC#C701867", Arrow Part Number=LM3880MF-1AB/NOPB, Manufacturer_Name="Texas Instruments", Mouser Part Number=926-LM3880MF1ABNOPB, Arrow Price/Stock=https://www.arrow.com/en/products/lm3880mf-1abnopb/texas-instruments?region=nac, Datasheet Link=http://www.ti.com/lit/gpn/lm3880, Height=1.45mm, Manufacturer_Part_Number=LM3880MF-1AB/NOPB, Mouser Price/Stock=https://www.mouser.co.uk/ProductDetail/Texas-Instruments/LM3880MF-1AB-NOPB?qs=QbsRYf82W3EUDzy5l%252BzEeQ%3D%3D
U102: library part "H-Bridge, SOT-563", "SOT-563 Relay / Coil Drivers ROHS, #DRV8210DRLR, JLC#C3681297"
U103: library part "Rohm ALS", "SMD-8P Ambient Light Sensors ROHS, JLC#C509781"
U201 U202: library part "Buck Converter, TPS62912RPUR", "Step-down type Adjustable 2A 800mV~5.5V 3V~17V VQFN-10-HR(2x2) DC-DC Converters ROHS, JLC#C3198056", Manufacturer_Name="Texas Instruments", Mouser Part Number=595-TPS62912RPUR, Arrow Part Number=TPS62912RPUR, Arrow Price/Stock=https://www.arrow.com/en/products/tps62912rpur/texas-instruments?utm_currency=USD&region=europe, Datasheet Link=https://www.ti.com/lit/gpn/TPS62912, Height=1mm, Manufacturer_Part_Number=TPS62912RPUR, Mouser Price/Stock=https://www.mouser.co.uk/ProductDetail/Texas-Instruments/TPS62912RPUR?qs=DRkmTr78QAT3V6egI4ak1w%3D%3D
U203: library part "TPS7A2018PDBVR, 1.8V", "300mA Fixed 1.8V Positive electrode 6V SOT-23-5L Voltage Regulators - Linear, Low Drop Out (LDO) Regulators ROHS, JLC#C963430"
U204: library part "TPS7A2018PDBVR, 3.3V", "300mA Fixed 3.3V Positive electrode 6V SOT-23-5 Voltage Regulators - Linear, Low Drop Out (LDO) Regulators ROHS, JLC#C2862740"
U601: library part "Level Shifter 4-Bit, Open Drain", "2.3V~5.5V 1 4 1.65V~3.6V 24Mbps TSSOP-14 Translators, Level Shifters ROHS, #TXS0104EPWR, JLC#C44955"
Y601: library part "Clock Oscillator, SMD3225, 37.125Mhz", "1.8V~3.3V ±10ppm ±20ppm CMOS 37.125MHz SMD3225-4P Crystal Oscillators ROHS, JLC#C2831393"

## Free pads (board coordinates)
  round 0 hole 2.7 unplated paste-2539.97 mask+3.05: MH(95,53) MH(95,102) MH(153,53) MH(153,102)
  round 0 hole 1.7 unplated paste-2539.97 mask+1.6: SH(113,77.5) SH(135,77.5)
  round 0 hole 1.152 unplated paste-2539.97 mask+0.748: TH(95,58.5) TH(95,96.5) TH(147.5,102)

## Via types
v1: diameter 0.5, hole 0.3, L1 (Sensor) to L4 (Comp), 221 vias
v2: diameter 0.45/0.45/0.45/0.45 (per signal layer), hole 0.3, L1 (Sensor) to L4 (Comp), 63 vias
v3: diameter 0.35, hole 0.2, L1 (Sensor) to L4 (Comp), 51 vias
v4: diameter 0.45, hole 0.3, L1 (Sensor) to L4 (Comp), 2 vias

## Nets (pads, with @x,y where several pads share a name; then routed paths per layer and width w, separated by ;. In a path a pad name is that pad's centre, name@x,y a point inside that pad or via, vN(x,y) a via of type N, cw(c..) or ccw(c..) an arc to the next point about the centre after c; other vN are vias at no path point)
1.2V_FILT: C214.1 C215.1 C216.1 C301.1 C302.1 C303.2 C304.2 C305.1 C306.1 C307.2 C308.2 C309.1 C310.1 C311.1 C312.1 C313.2 C314.2 C315.1 C316.1 C317.2 C318.2 C319.1 C320.1 C321.2 C322.2 C323.1 C324.1 C325.2 C326.2 IMX_.D4 IMX_.E4 IMX_.E9 IMX_.F4 IMX_.F9 IMX_.F12 IMX_.G9 IMX_.H12 IMX_.J4 IMX_.K4 IMX_.K12 IMX_.L12 IMX_.N3 L202.2 R207.2 TP9.1 U202.3 | length 29.2
  L1 (Sensor) w0.3: v1(127.5,68.5) 127.5,62.25 v1@130.278,59.472
  L1 (Sensor) w0.45: v1(123.35,68.5) v1(125.5,68.5)
  L4 (Comp) w0.25: C306.1@124.975,72.025 v2(125,72) ; v2(125,75) C323.1@125.075,75
  L4 (Comp) w0.3: C308.2@122.975,72.025 v2(123,72) ; v1@130.3,59.469 R207.2@130.3,60.25
  L4 (Comp) w0.45: C302.1@118.025,80.925 C302.1@118.025,80.975 ; C304.2@119.95,72.05 v2(120,72) ; C314.2@120.925,80.025 C314.2@120.975,80.025 ; TP9.1@120.95,68.5 v1(123.35,68.5) ; v2(121,72) 121.05,72.05 C310.1@121.075,72.05 ; v2(123,72) 123.05,72.05 C308.2@123.075,72.05 ; C325.2@123.95,74.95 v2(124,75) ; C319.1@124.925,80.05 C319.1@124.95,80.05 ; v2(125,72) 125.05,72.05 C306.1@125.075,72.05 ; v2(126,75) C321.2@126.05,74.95 ; v2(127,80) C315.1@127,80.025
  L4 (Comp) w0.5: C301.1@118.025,80 C302.1@118.025,81 ; C303.2@119,72.025 C304.2@119.975,72.025 ; C313.2@120,80.025 C314.2@121,80.025 ; C310.1@121.025,72.025 C309.1@122,72.025 ; C312.1@122,80.025 C311.1@123,80.025 ; C326.2@123,74.975 C325.2@123.975,74.975 ; C308.2@123.025,72.025 C307.2@124,72.025 ; C320.1@124,80.025 C319.1@124.95,80.025 ; v2(125,75) C324.1@125,76.025 ; C306.1@125.025,72.025 C305.1@126,72.025 ; C318.2@126,78.975 C317.2@126,80.025 ; C321.2@126.025,74.975 C322.2@127,74.975 ; C316.1@127,78.975 v2(127,80)
  other v1: 130.291,59.484 125,70.35 126,70.35 127,70.35 128,70.35 129,70.35
  other v2: 121,80 122,80 125,80 126,80 118,81
1.8V_FILT: C219.1 C220.1 C401.2 C402.2 C403.1 C404.1 C405.2 C406.2 C407.1 C408.1 C602.1 C603.1 C604.1 IMX_.E1 IMX_.J6 IMX_.J7 IMX_.K6 IMX_.K7 TP10.1 U203.5 U601.1 Y601.4 | length 30.9
  L3 (PWR) w0.3: v1(116,75.5) 116.825,76.325
  L4 (Comp) w0.3: TP10.1@109.5,68.5 110.05,69.05 110.05,74.323 ; 114.9,74.963 114.9,76.45 117.025,78.575 117.025,81.925 118.1,83 v2(126,83) ; C220.1@115.35,74 115.35,74.85 v1(116,75.5)
  L4 (Comp) w0.45: 107.225,76.575 U601.1@107.225,77.1 ; C407.1@120.95,76.95 v2(121,77) ; C403.1@120.975,78.025 v2(121,78) ; v2(122,77) 122.05,76.95 C405.2@122.075,76.95 ; v2(122,78) C401.2@122.05,78.05
  L4 (Comp) w0.5: C408.1@120,76.975 C407.1@120.975,76.975 ; C404.1@120,78.025 C403.1@120.975,78.025 ; C405.2@122.025,76.975 C406.2@123,76.975 ; C401.2@122.025,78.025 C402.2@123,78.025
3.3V_FILT: C223.1 C224.1 C501.1 C502.1 C503.1 C504.1 C505.2 C506.2 C507.1 C508.1 C509.1 C510.1 IMX_.A4 IMX_.A7 IMX_.A8 IMX_.A9 IMX_.A10 TP11.1 U204.5 | length 13.6
  L1 (Sensor) w0.3: v1(133,75) 138.898,75 139.498,74.4 v1(139.5,74.4)
  L4 (Comp) w0.3: TP11.1@138.9,76.1 139.5,75.5 v1(139.5,74.4)
  L4 (Comp) w0.45: C502.1@129.95,77.05 v4(130,77) ; C508.1@129.975,73.975 v2(130,74) ; C509.1@129.975,80.025 v2(130,80) ; C505.2@131.025,75 C505.2@131.075,74.95 ; C503.1@131.025,76 C503.1@131.075,76.05
  L4 (Comp) w0.5: C507.1@129.975,73.175 C508.1@129.975,73.975 ; C502.1@129.975,77.025 C501.1@129.975,78 ; C509.1@129.975,80.025 C510.1@129.975,80.85 ; v2(130,75) C505.2@131.025,75 ; v2(130,76) C503.1@131.025,76
  other v1: 132,74.5 132,75.5 132,76.5
3.8V_FILT: C207.1 C208.1 C209.1 C210.1 C211.1 C212.1 C217.1 C218.1 C221.1 C222.1 FB201.2 R203.2 TP8.1 U202.6 U203.1 U204.1 | length 27.7
  L1 (Sensor) w0.3: v1(139.775,63.45) 139.775,63.463 142.2,65.888 v1(142.2,65.9)
  L4 (Comp) w0.3: TP8.1@115.2,64 117.2,64 118.1,64.9 ; v1(139.775,63.45) 136.825,60.5 136.825,52.875 137.9,51.8 144.625,51.8 144.875,51.55 144.875,51.275 R203.2@145.075,51.075
3.8V_VOUT: C205.1 C206.1 FB201.1 L201.2 U201.3
CSI2_3.3V: C601.2 J801.22 U601.14 | length 10.5
  L4 (Comp) w0.45: U601.14@107.225,83.125 107.225,84.075 107.65,84.5 C601.2@108.3,84.5 109.525,84.5 111.027,86.002 J801.22@111.027,90.97
CSI2_CK_N: IMX_.J2 J801.8 | length 32
  L1 (Sensor) w0.2: IMX_.J2@122,82 122.49,82.49 122.49,83.36 122.41,83.44 122.41,83.75 122.405,83.755 122.405,90.378 122.405,90.9 121.931,91.374 120.69,91.374 120.45,91.614 120.45,92.334 120.69,92.574 123.202,92.574 123.676,93.049 123.676,94.1 123.202,94.574 122.645,94.574 122.405,94.814 122.405,95.031 122.405,95.417 v3(122.55,95.562)
  L4 (Comp) w0.2: J801.8@111.027,98.056 111.877,98.056 111.927,98.005 116.26,98.005 117.391,96.875 121.816,96.875 122.405,96.286 122.405,95.699 ; 122.403,95.697 v3@122.544,95.556
CSI2_CK_P: IMX_.J1 J801.9 | length 32
  L1 (Sensor) w0.2: v3(121.87,95.564) 122.005,95.429 ; IMX_.J1@122.005,83.005 122.005,86.038 121.888,86.155 121.623,86.155 121.523,86.255 121.523,87.055 121.623,87.155 121.905,87.155 122.005,87.255 122.005,88.055 121.905,88.155 121.391,88.155 121.291,88.255 121.291,89.055 121.391,89.155 121.888,89.155 122.005,89.272 122.005,90.378 122.005,90.734 121.765,90.974 120.524,90.974 120.05,91.449 120.05,92.5 120.524,92.974 123.036,92.974 123.276,93.214 123.276,93.934 123.036,94.174 122.479,94.174 122.005,94.649 122.005,95.031 122.005,95.428
  L4 (Comp) w0.2: J801.9@111.027,97.555 111.877,97.555 111.927,97.605 116.095,97.605 117.225,96.475 121.65,96.475 122.005,96.12 122.005,95.699 v3@121.864,95.558
CSI2_D0_N: IMX_.H2 J801.2 | length 32
  L1 (Sensor) w0.2: IMX_.H2@123,82 123.5,82.5 123.5,83.35 123.41,83.44 123.41,84.56 125.5,86.65 125.5,95.407 v3(125.645,95.552)
  L4 (Comp) w0.2: J801.2@111.027,101.056 111.877,101.056 111.927,101.005 120.795,101.005 125.505,96.295 125.505,95.733 125.639,95.599 v3@125.639,95.546
CSI2_D0_P: IMX_.H1 J801.3 | length 32
  L1 (Sensor) w0.2: IMX_.H1@123,83 123,84.716 123.466,85.181 123.536,85.252 123.536,85.418 123.182,85.772 123.182,85.913 123.748,86.479 123.89,86.479 124.244,86.125 124.409,86.125 124.49,86.206 125.1,86.816 125.1,87.216 125.1,87.316 124.983,87.433 124.713,87.433 124.613,87.533 124.613,88.333 124.713,88.433 124.983,88.433 125.1,88.55 125.1,88.9 125.1,95.419 v3(124.964,95.554)
  L4 (Comp) w0.2: J801.3@111.027,100.555 111.877,100.555 111.927,100.605 120.629,100.605 125.105,96.129 125.105,95.735 124.959,95.589 v3@124.959,95.548
CSI2_D1_N: IMX_.K2 J801.5 | length 32
  L1 (Sensor) w0.2: v3(119.445,97.92) 119.3,97.775 119.3,95.575 118.525,94.8 116.684,94.8 116.384,95.1 115.875,95.1 115.3,94.525 115.3,94.131 119.298,90.133 119.298,87.243 119.3,87.241 119.3,86.841 121.41,84.731 121.41,83.44 121.49,83.36 121.49,82.49 IMX_.K2@121,82
  L4 (Comp) w0.2: J801.5@111.027,99.555 111.077,99.506 118.719,99.506 119.3,98.925 119.3,98.057 ; 119.298,98.055 v3@119.439,97.914
CSI2_D1_P: IMX_.K1 J801.6 | length 32
  L1 (Sensor) w0.2: v3(118.765,97.922) 118.9,97.787 ; 118.898,87.074 118.898,87.308 118.781,87.425 118.382,87.425 118.282,87.525 118.282,88.325 118.382,88.425 118.781,88.425 118.898,88.542 118.898,89.642 118.898,89.968 114.9,93.966 114.9,94.691 115.709,95.5 116.55,95.5 116.85,95.2 118.359,95.2 118.9,95.741 118.9,97.775 ; 118.9,87.075 118.9,86.675 119.261,86.314 119.332,86.243 119.342,86.233 119.342,86.067 119.074,85.8 119.074,85.658 119.64,85.093 119.781,85.093 120.049,85.36 120.215,85.36 120.285,85.29 121,84.575 IMX_.K1@121,83
  L4 (Comp) w0.2: J801.6@111.027,99.056 111.077,99.106 111.927,99.106 118.554,99.106 118.9,98.759 118.9,98.057 v3@118.759,97.916
CSI2_D2_N: IMX_.G2 J801.11 | length 32
  L1 (Sensor) w0.2: IMX_.G2@124,82 124.49,82.49 124.49,83.36 124.41,83.44 124.41,83.75 124.71,84.05 126.891,84.05 128.6,85.759 128.6,89.218 128.747,89.366 v3(128.747,89.406)
  L4 (Comp) w0.2: J801.11@111.027,96.555 111.877,96.556 111.927,96.506 114.185,96.506 120.175,90.516 126.716,90.516 126.925,90.725 128.125,90.725 128.6,90.25 128.6,89.594 128.741,89.453 v3@128.741,89.4
CSI2_D2_P: IMX_.G1 J801.12 | length 32
  L1 (Sensor) w0.2: IMX_.G1@124,83 124,83.906 124.544,84.45 124.982,84.45 125.082,84.45 125.199,84.567 125.199,84.942 125.299,85.042 126.099,85.042 126.199,84.942 126.199,84.567 126.316,84.45 126.427,84.45 126.725,84.45 127.093,84.818 127.164,84.889 127.164,85.054 126.882,85.335 126.882,85.477 127.448,86.043 127.59,86.043 127.871,85.761 128.036,85.761 128.2,85.925 128.2,86.039 128.2,89.234 128.067,89.368 v3(128.067,89.408)
  L4 (Comp) w0.2: J801.12@111.027,96.056 111.877,96.056 111.927,96.106 114.019,96.106 120.009,90.116 126.881,90.116 127.091,90.325 127.959,90.325 128.2,90.084 128.2,89.582 128.061,89.443 v3@128.061,89.402